# EAGLE board PCB-AC2b (EAGLE 6.4)
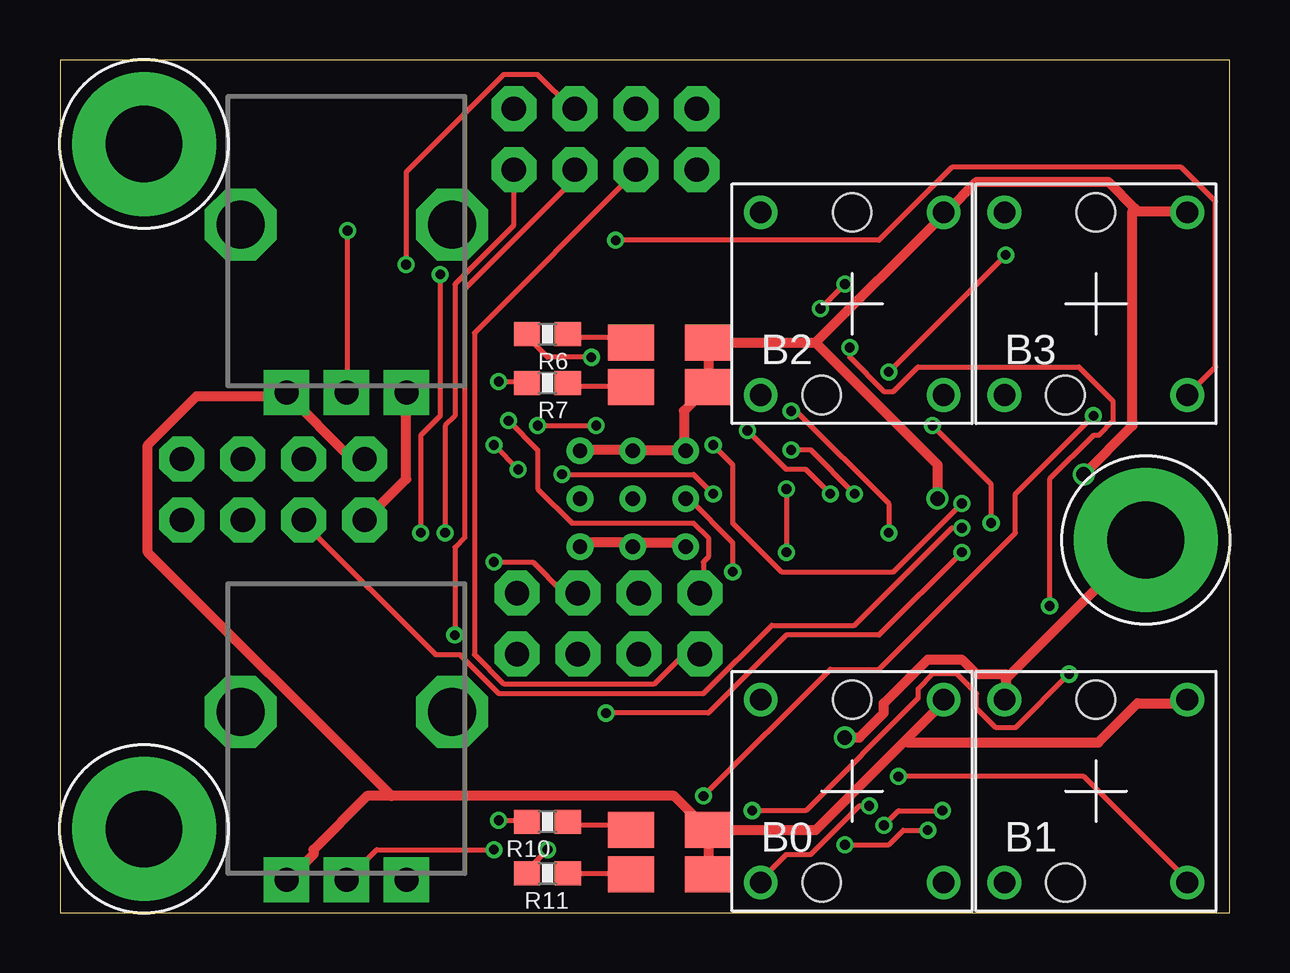
[diagram p0: board, top side]
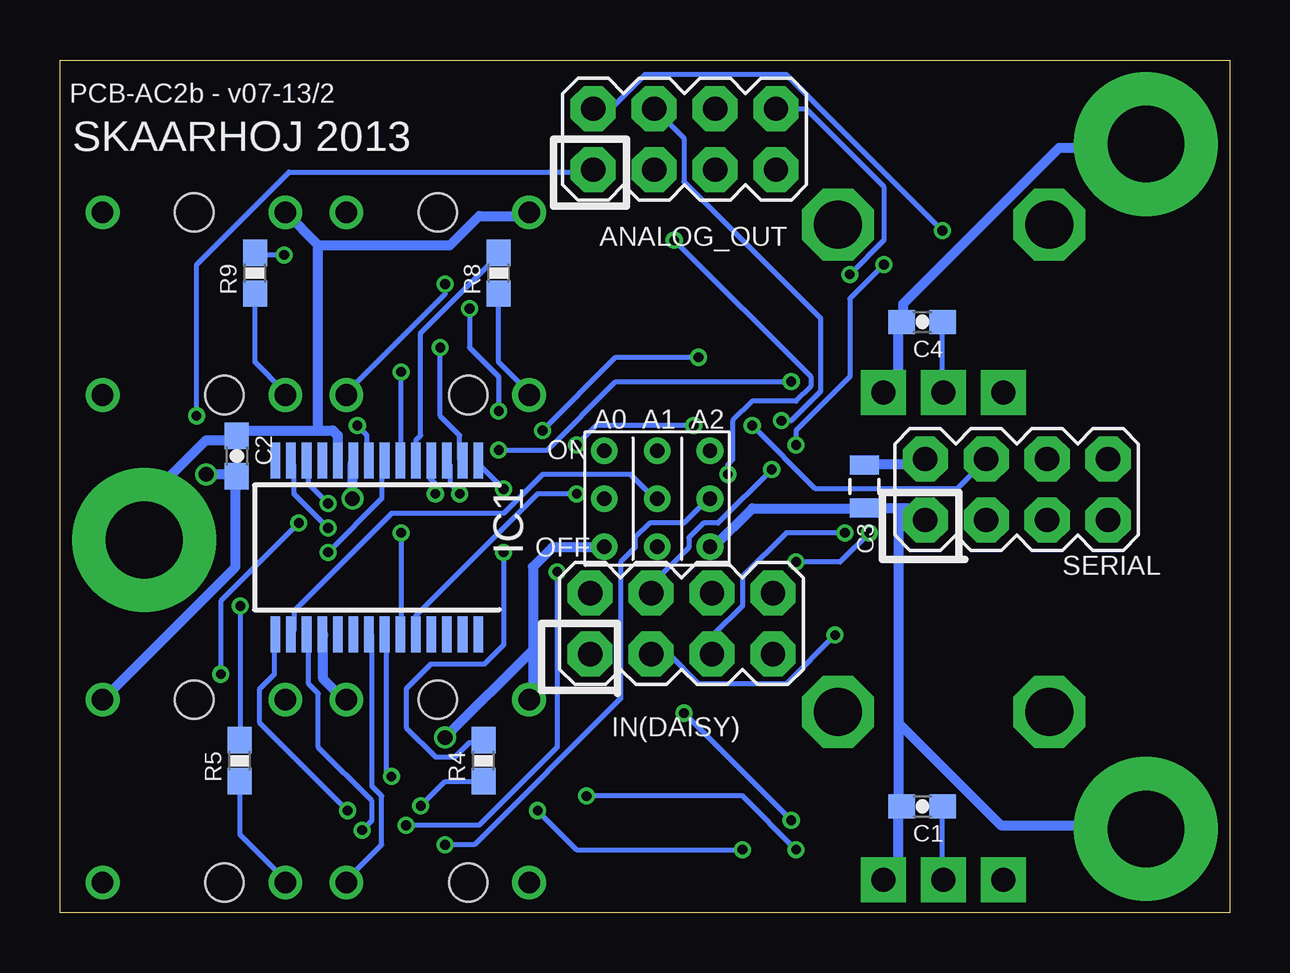
[diagram p1: board, bottom side, seen from below]

Size 48.77 x 35.56 mm. Coordinates in mm from the lower left corner, seen from the top.
Outline: 0,0 48.77,0 48.77,35.56 0,35.56 0,0
Copper layers (1*16): Top 0.035mm / dielectric 1.5mm / Bottom 0.035mm
Design rules "Fusion_eagle_rule_v1.1": minimum track width 6mil, minimum drill 12mil, track to track 6mil, track to pad 6mil, pad to pad 6mil, via to via 6mil, smd to smd 0mil, copper to edge 10mil, drill to drill 10mil, minimum pad ring 10mil, minimum via ring 6mil, stop-mask expansion 2mil, vias tented up to drill 100mil, thermal gap 10mil
Net classes: 0 default: width 0.203 mm, drill 0.406 mm, clearance 0.203 mm; 1 Power: width 0.406 mm, drill 0.61 mm, clearance 0.203 mm

## Footprints (pad centres in the part's own frame; a part is rotated, then mirrored left to right if it is on the bottom)
2X4 = drill 1.016 pad 1.88 octagon: 1 -3.81,-1.27; 2 -3.81,1.27; 3 -1.27,-1.27; 4 -1.27,1.27; 5 1.27,-1.27; 6 1.27,1.27; 7 3.81,-1.27; 8 3.81,1.27
CFPB-6/9MM = drill 0.9: P$1 -3.81,3.81; P$2 3.81,-3.81; P$3 3.81,3.81; P$4 -3.81,-3.81 | hole 1.6: 0,3.81; -1.27,-3.81
LEDBICOLOR-SMD = smd 1.9 x 1.5: P$1 1.6,0.925; P$2 -1.6,0.925; P$3 1.6,-0.925; P$4 -1.6,-0.925
0603-CAP = smd 1.1 x 1: 1 -0.85,0; 2 0.85,0
0805 = smd 0.8 x 1.2: 1 -0.9,0; 2 0.9,0
SSOP28 = smd 0.4 x 1.5: 1 -4.225,-3.625; 2 -3.575,-3.625; 3 -2.925,-3.625; 4 -2.275,-3.625; 5 -1.625,-3.625; 6 -0.975,-3.625; 7 -0.325,-3.625; 8 0.325,-3.625; 9 0.975,-3.625; 10 1.625,-3.625; 11 2.275,-3.625; 12 2.925,-3.625; 13 3.575,-3.625; 14 4.225,-3.625; 15 4.225,3.625; 16 3.575,3.625; 17 2.925,3.625; 18 2.275,3.625; 19 1.625,3.625; 20 0.975,3.625; 21 0.325,3.625; 22 -0.325,3.625; 23 -0.975,3.625; 24 -1.625,3.625; 25 -2.275,3.625; 26 -2.925,3.625; 27 -3.575,3.625; 28 -4.225,3.625
ALPS_POT = drill 1 pad 1.88 square: P$1 7,-2.5; P$2 7,0; P$3 7,2.5 | drill 2 octagon: P$4 0,-4.4; P$5 0,4.4
0603-RES = smd 1.1 x 1: 1 -0.85,0; 2 0.85,0
3.2MMPAD6MM = drill 3.2 pad 6: P$1 0,0
3BITADDR = drill 0.6: A0 -2.2,0; A1 0,0; A2 2.2,0; H1 -2.2,2; H2 0,2; H3 2.2,2; L1 -2.2,-2; L2 0,-2; L3 2.2,-2

## Placement (x,y rotation side)
ANALOG_OUT  M04X2  [2X4]  22.73,32.26 0 bottom
B0  CFPB  [CFPB-6/9MM]  33.02,5.08 0 top
B1  CFPB  [CFPB-6/9MM]  43.18,5.08 0 top
B2  CFPB  [CFPB-6/9MM]  33.02,25.4 0 top
B3  CFPB  [CFPB-6/9MM]  43.18,25.4 0 top
BILED1  LEDBICOLOR-SMD  [LEDBICOLOR-SMD]  25.4,2.54 0 top
BILED2  LEDBICOLOR-SMD  [LEDBICOLOR-SMD]  25.4,22.86 0 top
C1  10nF  [0603-CAP]  12.83,4.45 180 bottom
C2  100nF  [0603-CAP]  41.4,19.05 270 bottom
C3  10uF  [0805]  15.24,17.78 270 bottom
C4  10nF  [0603-CAP]  12.83,24.64 180 bottom
IC1  MCP23017SS  [SSOP28]  35.56,15.24 180 bottom
IN(DAISY)  M04X2  [2X4]  22.86,12.06 0 bottom
POT1  10K  [ALPS_POT]  11.94,8.38 270 top
POT2  10K  [ALPS_POT]  11.94,28.7 270 top
R4  47R  [0603-RES]  31.11,6.35 90 bottom
R5  47R  [0603-RES]  41.27,6.35 90 bottom
R6  820R  [0603-RES]  20.32,24.13 180 top
R7  150R  [0603-RES]  20.32,22.1 180 top
R8  47R  [0603-RES]  30.48,26.67 90 bottom
R9  47R  [0603-RES]  40.64,26.67 90 bottom
R10  820R  [0603-RES]  20.32,3.81 180 top
R11  150R  [0603-RES]  20.32,1.65 180 top
SERIAL  M04X2  [2X4]  8.89,17.65 0 bottom
U$1  GNDPAD6MM  [3.2MMPAD6MM]  3.5,3.5 0 top
U$15  GNDPAD6MM  [3.2MMPAD6MM]  3.5,32.06 0 top
U$19  3BITADDR  [3BITADDR]  23.88,17.27 0 bottom
U$21  GNDPAD6MM  [3.2MMPAD6MM]  45.26,15.55 0 top

## Library data of the parts
ANALOG_OUT C1-C4 IN(DAISY) POT1 POT2 R4-R11 SERIAL = SparkFun
B0 B1-B3 BILED1 BILED2 U$1 U$15 U$19 U$21 = SKAARHOJ
IC1 = microchip; MF: MICROCHIP; MPN: MCP23017-E/SS; OC_FARNELL: 1467674; OC_NEWARK: 31K2960

## Nets
5V [Power]: B0.P$3 B1.P$3 B2.P$3 B3.P$3 BILED1.P$1 BILED1.P$3 BILED2.P$1 BILED2.P$3 C2.2 C3.1 IC1.9 IC1.18 POT1.P$1 POT2.P$1 SERIAL.2 U$19.H1 U$19.H2 U$19.H3
A0: IC1.15 U$19.A0
A1: IC1.16 U$19.A1
A2: IC1.17 U$19.A2
ANALOG1: ANALOG_OUT.1 C1.1 POT1.P$2
ANALOG2: ANALOG_OUT.2 C4.1 POT2.P$2
GND [Power]: B0.P$1 B1.P$1 B2.P$1 B3.P$1 C1.2 C2.1 C3.2 C4.2 IC1.10 POT1.P$3 POT2.P$3 SERIAL.1 U$1.P$1 U$15.P$1 U$19.L1 U$19.L2 U$19.L3 U$21.P$1
GPA0: B0.P$2 IC1.21
GPA1: B1.P$2 IC1.22
GPA2: B2.P$2 IC1.23
GPA3: B3.P$2 IC1.24
I2C_SCL: IC1.12 SERIAL.4
I2C_SDA: IC1.13 SERIAL.3
L0: B0.P$4 R4.1
L1: B1.P$4 R5.1
L2: BILED2.P$2 R6.1
L3: BILED2.P$4 R7.1
L4: B2.P$4 R8.1
L5: B3.P$4 R9.1
L6: BILED1.P$2 R10.1
L7: BILED1.P$4 R11.1
N$2: IC1.4 R7.2
N$3: IC1.5 R8.2
N$4: IC1.6 R9.2
N$5: IC1.7 R10.2
N$6: IC1.8 R11.2
N$7: IC1.3 R6.2
N$8: IC1.2 R5.2
N$9: IC1.1 R4.2
N$10: ANALOG_OUT.3 IN(DAISY).1
N$11: ANALOG_OUT.5 IN(DAISY).3
N$12: ANALOG_OUT.7 IN(DAISY).5
N$13: ANALOG_OUT.4 IN(DAISY).2
N$14: ANALOG_OUT.6 IN(DAISY).4
N$15: ANALOG_OUT.8 IN(DAISY).6

## Tracks (layer width: path | path; a pad name or v marks a point on that pad's centre or on a via)
5V  (via drill 0.61)
  Top 0.406: U$19.H3 21.74,19.3 23.77,19.3 U$19.H2 23.98,19.3 26.01,19.3 U$19.H1 26.01,19.51 26.01,20.93 26.82,21.74 BILED2.P$3 27.03,21.95 27.03,23.57 BILED2.P$1 27.03,23.77 31.5,23.77 | v36.58,17.27 36.58,18.69 31.5,23.77 | 31.5,23.77 36.78,29.06 B2.P$3 36.98,29.26 38.2,30.48 43.69,30.48 44.81,29.36 | 44.81,29.36 44.91,29.26 46.94,29.26 B3.P$3 | SERIAL.2 12.6,19.1 11.99,19.1 9.55,21.54 POT2.P$1 9.35,21.54 5.69,21.54 3.66,19.51 3.66,15.04 13.82,4.88 | BILED1.P$3 27.03,1.63 27.03,3.45 BILED1.P$1 | 35.26,7.21 36.78,8.74 B0.P$3 | 35.26,7.21 31.5,3.45 27.23,3.45 BILED1.P$1 | 13.82,4.88 25.6,4.88 26.82,3.66 BILED1.P$1 | 13.82,4.88 12.8,4.88 10.57,2.64 10.57,2.44 9.55,1.42 POT1.P$1 | B1.P$3 46.94,8.74 44.91,8.74 43.28,7.11 35.36,7.11 35.26,7.21 | v42.67,18.29 44.7,20.32 44.7,29.26 44.81,29.36
  Bottom 0.406: v36.58,17.27 36.58,18.69 IC1.9 | B1.P$3 41.45,14.43 41.45,18.09 C2.2 41.45,18.29 v42.67,18.29 | C3.1 15.24,18.69 13.01,18.69 12.8,18.9 SERIAL.2 | IC1.18 37.8,11.58 37.8,9.75 36.98,8.94 B0.P$3
A0  (via drill 0.41)
  Top 0.203: v36.78,4.27 34.95,4.27 v34.34,3.66 | v28.04,14.22 28.04,15.44 26.21,17.27 U$19.A0
  Bottom 0.203: v36.78,4.27 40.44,7.92 40.44,9.35 39.83,9.96 39.83,11.58 IC1.15 | v34.34,3.66 31.29,3.66 28.04,6.91 v28.04,14.22
A1
  Bottom 0.203: IC1.16 39.01,11.79 39.01,12.6 34.95,16.66 30.28,16.66 28.65,18.29 24.99,18.29 23.98,17.27 U$19.A1
A2  (via drill 0.41)
  Top 0.203: v36.17,3.45 35.15,3.45 34.54,2.85 v32.72,2.85
  Bottom 0.203: v36.17,3.45 35.76,3.86 35.76,4.67 38,6.91 38,9.14 38.41,9.55 38.41,11.58 IC1.17 | v32.72,2.85 31.5,2.85 25.4,8.94 25.4,14.63 24.79,15.24 24.79,15.65 24.18,16.26 22.76,16.26 21.74,17.27 U$19.A2
ANALOG1  (via drill 0.41)
  Top 0.203: v43.08,20.73 39.83,17.48 39.83,15.85 34.14,10.16 32.11,10.16 v26.82,4.88 | v18.09,2.64 13.21,2.64 11.99,1.42 POT1.P$2
  Bottom 0.203: C1.1 11.99,4.27 11.99,1.42 POT1.P$2 | v43.08,20.73 43.08,27.03 39.22,30.89 26.62,30.89 ANALOG_OUT.1 | v26.82,4.88 20.32,4.88 v18.09,2.64
ANALOG2  (via drill 0.41)
  Top 0.203: v11.99,28.45 11.99,21.74 POT2.P$2
  Bottom 0.203: C4.1 11.99,24.59 11.99,21.74 POT2.P$2 | ANALOG_OUT.2 25.81,33.53 24.38,34.95 18.49,34.95 v11.99,28.45
GND  (via drill 0.61)
  Top 0.406: 39.52,9.86 45.11,15.44 U$21.P$1 | 39.52,9.86 39.42,9.75 39.42,8.94 B1.P$1 | U$19.L3 21.74,15.44 23.77,15.44 U$19.L2 23.98,15.44 26.01,15.44 U$19.L1 | POT2.P$3 14.43,21.54 14.43,18.09 12.8,16.46 SERIAL.1 | v32.72,7.32 33.33,7.32 34.34,8.33 34.34,8.74 36.17,10.57 37.59,10.57 38.2,9.96 39.42,9.96 39.52,9.86
  Bottom 0.406: 38,27.84 32.51,27.84 31.29,29.06 29.26,29.06 B2.P$1 | B3.P$1 38,27.84 | U$21.P$1 45.11,15.65 45.11,17.27 42.67,19.71 41.45,19.71 C2.1 41.25,19.91 41.05,20.12 38,20.12 | 38,20.12 37.39,20.12 37.19,19.91 37.19,18.9 IC1.10 | 38,20.12 38,27.84 | POT1.P$3 14.43,1.42 13.82,2.03 13.82,4.27 C1.2 13.82,4.47 13.82,7.92 | POT2.P$3 14.43,21.74 13.82,22.35 13.82,24.59 C4.2 13.61,24.79 13.61,25.4 7.11,31.9 3.66,31.9 U$15.P$1 | 13.82,16.87 13.21,16.87 12.8,16.46 SERIAL.1 | 13.82,16.87 15.24,16.87 | 29.06,10.97 29.06,14.43 28.25,15.24 26.21,15.24 U$19.L1 | 29.06,10.97 29.06,8.94 B0.P$1 | 15.24,16.87 19.91,16.87 21.54,15.24 U$19.L3 | 15.24,16.87 C3.2 | 13.82,16.87 13.82,7.92 | 13.82,7.92 9.55,3.66 3.66,3.66 U$1.P$1 | 29.06,10.97 v32.72,7.32
GPA0
  Bottom 0.203: IC1.21 35.76,11.58 35.76,5.28 35.36,4.88 35.36,2.85 36.78,1.42 B0.P$2
GPA1  (via drill 0.41)
  Top 0.203: v34.95,5.69 42.67,5.69 46.94,1.42 B1.P$2
  Bottom 0.203: v34.95,5.69 35.15,5.89 35.15,11.58 IC1.22
GPA2  (via drill 0.41)
  Top 0.203: v34.54,15.85 34.54,17.07 30.68,20.93 v30.48,20.93 | v32.72,26.21 v31.7,25.2
  Bottom 0.203: v34.54,15.85 34.54,11.79 IC1.23 | v30.48,20.93 30.48,22.35 31.7,23.57 v31.7,25.2 | v32.72,26.21 32.72,25.81 36.78,21.74 B2.P$2
GPA3  (via drill 0.41)
  Top 0.203: v27.23,17.48 26.42,18.29 v20.93,18.29 | v23.16,28.04 34.14,28.04 37.19,31.09 46.74,31.09 48.16,29.67 48.16,22.76 B3.P$2
  Bottom 0.203: v27.23,17.48 28.85,17.48 33.93,12.39 33.93,11.79 IC1.24 | v20.93,18.29 20.93,18.69 20.73,18.9 20.73,20.52 19.91,21.34 18.09,21.34 17.48,21.95 17.48,22.35 v23.16,28.04
I2C_SCL  (via drill 0.41)
  Top 0.203: v37.59,17.07 34.75,14.22 30.07,14.22 28.04,16.26 28.04,18.69 v27.23,19.51 | v19.91,20.32 v22.35,20.32
  Bottom 0.203: v37.59,17.07 38.41,17.88 38.41,18.69 IC1.12 | v27.23,19.51 26.42,20.32 v22.35,20.32 | v19.91,20.32 17.27,17.68 11.38,17.68 10.16,18.9 SERIAL.4
I2C_SDA  (via drill 0.41)
  Top 0.203: v37.59,16.05 37.19,16.05 33.12,11.99 29.67,11.99 26.82,9.14 18.29,9.14 16.66,10.77 15.65,10.77 10.16,16.26 SERIAL.3
  Bottom 0.203: v37.59,16.05 39.01,17.48 39.01,18.69 IC1.13
L0  (via drill 0.41)
  Top 0.203: v33.73,4.47 33.33,4.47 31.29,2.44 30.28,2.44 29.26,1.42 B0.P$4
  Bottom 0.203: v33.73,4.47 32.72,5.49 31.29,5.49 R4.1
L1
  Bottom 0.203: R5.1 41.25,5.49 41.25,3.25 39.42,1.42 B1.P$4
L2
  Top 0.203: R6.1 21.34,23.98 23.77,23.98 BILED2.P$2
L3
  Top 0.203: R7.1 21.34,21.95 23.77,21.95 BILED2.P$4
L4
  Bottom 0.203: R8.1 30.48,22.96 29.26,21.74 B2.P$4
L5
  Bottom 0.203: R9.1 40.64,22.96 39.42,21.74 B3.P$4
L6
  Top 0.203: R10.1 21.34,3.66 23.77,3.66 BILED1.P$2
L7
  Top 0.203: R11.1 21.34,1.63 23.77,1.63 BILED1.P$4
N$2  (via drill 0.41)
  Top 0.203: v18.29,22.15 19.3,22.15 R7.2 | v30.48,19.3 31.29,19.3 v33.12,17.48
  Bottom 0.203: v18.29,22.15 25.6,22.15 28.45,19.3 v30.48,19.3 | v33.12,17.48 33.12,17.88 33.33,18.09 33.33,18.69 IC1.4
N$3
  Bottom 0.203: R8.2 30.48,27.43 33.73,24.18 33.73,19.91 33.93,19.71 33.93,18.9 IC1.5
N$4  (via drill 0.41)
  Top 0.203: v34.54,22.55 v39.42,27.43
  Bottom 0.203: v39.42,27.43 40.64,27.43 R9.2 | v34.54,22.55 34.54,18.9 IC1.6
N$5  (via drill 0.41)
  Top 0.203: v18.29,3.86 19.3,3.86 R10.2 | v22.76,8.33 27.03,8.33 30.28,11.58 34.14,11.58 v37.59,15.04
  Bottom 0.203: v22.76,8.33 v18.29,3.86 | v37.59,15.04 35.36,17.27 35.36,18.69 IC1.7
N$6  (via drill 0.41)
  Top 0.203: v20.32,2.64 19.51,1.83 R11.2 | v28.85,4.27 31.09,4.27 35.76,8.94 35.76,9.35 36.37,9.96 37.39,9.96 38.2,9.14 38.2,8.53 39.01,7.72 39.83,7.72 v42.06,9.96 | v38.81,16.26 38.81,17.88 v36.37,20.32
  Bottom 0.203: v20.32,2.64 27.23,2.64 v28.85,4.27 | v42.06,9.96 42.06,13.01 v38.81,16.26 | v36.37,20.32 35.97,19.91 35.97,18.9 IC1.8
N$7  (via drill 0.41)
  Top 0.203: v22.15,23.16 20.32,23.16 19.51,23.98 R6.2 | v28.65,20.12 30.28,18.49 31.09,18.49 v32.11,17.48
  Bottom 0.203: v22.15,23.16 25.6,23.16 v28.65,20.12 | v32.11,17.48 32.51,17.88 32.51,18.69 IC1.3
N$8  (via drill 0.41)
  Top 0.203: v41.25,12.8 41.25,18.09 43.08,19.91 43.28,19.91 43.89,20.52 43.89,21.34 42.47,22.76 35.76,22.76 34.75,21.74 34.34,21.74 32.92,23.16 v32.92,23.57
  Bottom 0.203: v41.25,12.8 41.25,7.32 R5.2 | v32.92,23.57 32.92,20.73 32.11,19.91 32.11,18.9 IC1.2
N$9  (via drill 0.41)
  Top 0.203: v30.28,17.68 v30.28,15.04
  Bottom 0.203: v30.28,15.04 30.28,11.18 31.09,10.36 33.33,10.36 34.34,9.35 34.34,7.72 33.12,6.5 32.31,6.5 31.7,7.11 31.29,7.11 R4.2 | v30.28,17.68 31.29,18.69 IC1.1
N$10
  Top 0.203: IN(DAISY).1 26.62,10.77 26.01,10.77 24.79,9.55 18.49,9.55 17.27,10.77 17.27,24.18 23.98,30.89 ANALOG_OUT.3
N$11  (via drill 0.41)
  Top 0.203: v16.46,11.58 16.46,15.24 16.87,15.65 16.87,26.01 21.34,30.48 21.34,30.89 ANALOG_OUT.5
  Bottom 0.203: v16.46,11.58 18.49,9.55 22.15,9.55 23.37,10.77 23.98,10.77 IN(DAISY).3
N$12  (via drill 0.41)
  Top 0.203: v16.05,15.85 16.05,20.32 16.46,20.73 16.46,26.21 18.9,28.65 18.9,30.89 ANALOG_OUT.7
  Bottom 0.203: v16.05,15.85 18.49,15.85 20.32,14.02 20.32,12.8 21.54,11.58 21.54,10.97 IN(DAISY).5
N$13  (via drill 0.41)
  Top 0.203: v18.69,20.52 19.91,19.3 19.91,17.68 21.34,16.26 26.42,16.26 27.03,15.65 27.03,14.83 26.82,14.63 26.82,13.41 IN(DAISY).2
  Bottom 0.203: v18.69,20.52 18.29,20.52 17.07,21.74 17.07,24.79 22.76,30.48 22.76,32.31 23.98,33.53 ANALOG_OUT.4
N$14  (via drill 0.41)
  Top 0.203: v18.09,19.51 v19.1,18.49 | v14.43,27.03 14.43,30.89 18.49,34.95 19.91,34.95 21.34,33.53 ANALOG_OUT.6
  Bottom 0.203: v19.1,18.49 21.34,16.26 21.95,16.26 22.55,15.65 22.55,15.24 23.98,13.82 23.98,13.41 IN(DAISY).4 | v18.09,19.51 18.09,20.12 15.85,22.35 15.85,25.6 v14.43,27.03
N$15  (via drill 0.41)
  Top 0.203: v18.09,14.63 19.71,14.63 20.93,13.41 21.54,13.41 IN(DAISY).6 | v15.04,15.85 15.04,19.91 15.85,20.73 v15.85,26.62
  Bottom 0.203: v18.09,14.63 16.26,14.63 v15.04,15.85 | v15.85,26.62 14.43,28.04 14.43,30.28 17.68,33.53 ANALOG_OUT.8

## Text on the board
_bsilk: PCB-AC2b - v07-13/2 | SKAARHOJ 2013